# Altium PCB BMS pcb layout 3.PcbDoc
Units mil, origin at the board's own origin, x right, y up, seen from the top; angles counter-clockwise.
Board outline 3940 x 3940 mil, 2 copper layers (Top Layer, Bottom Layer); 55 components, 40 nets, 194 pads, 52 vias.
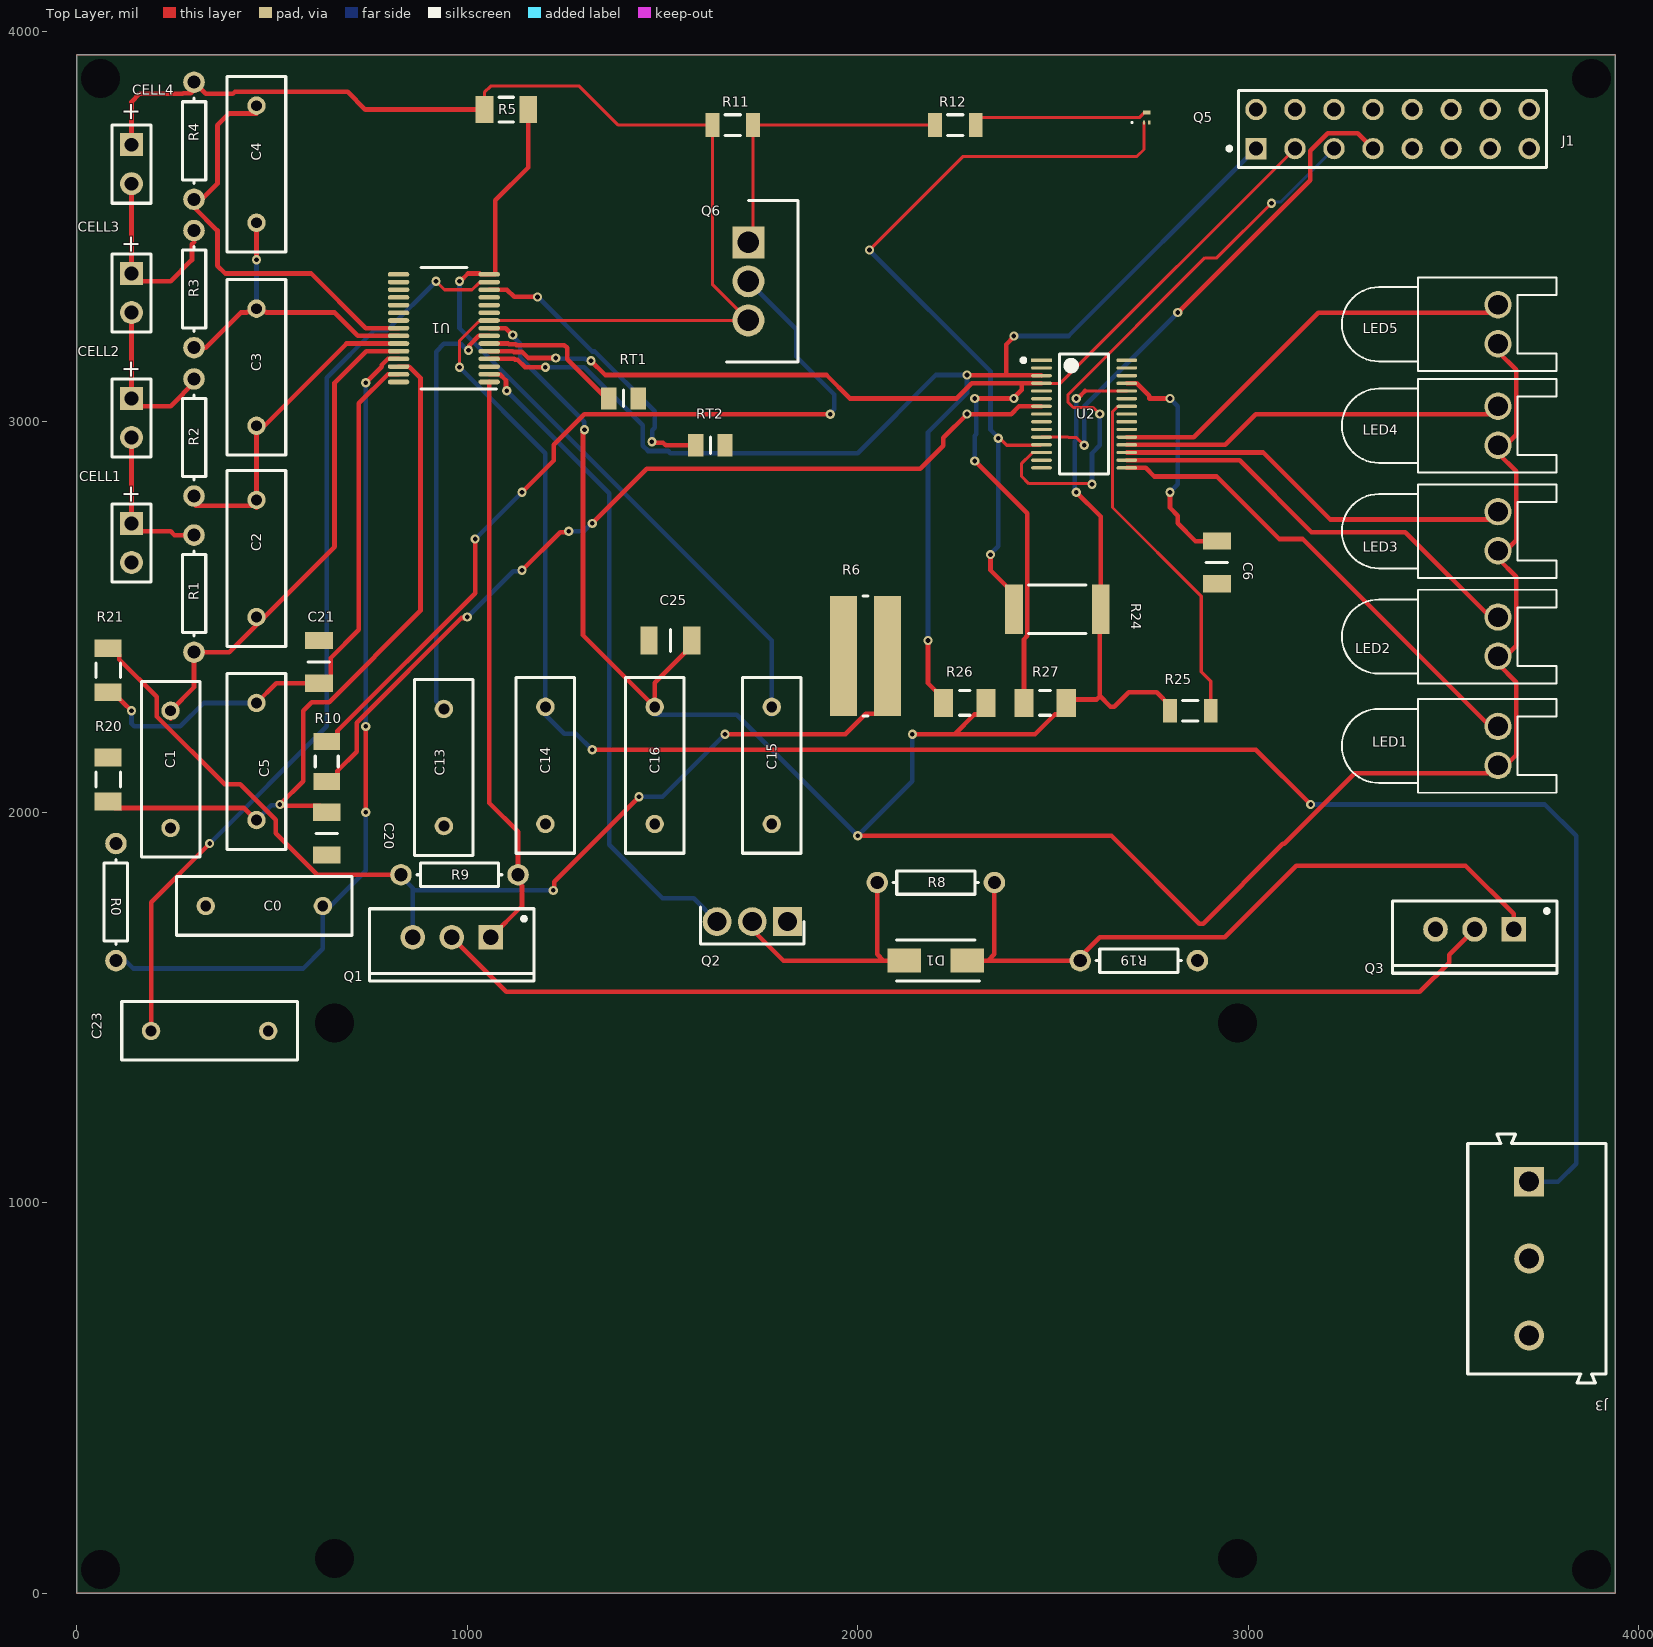
[diagram p0: Top Layer view]
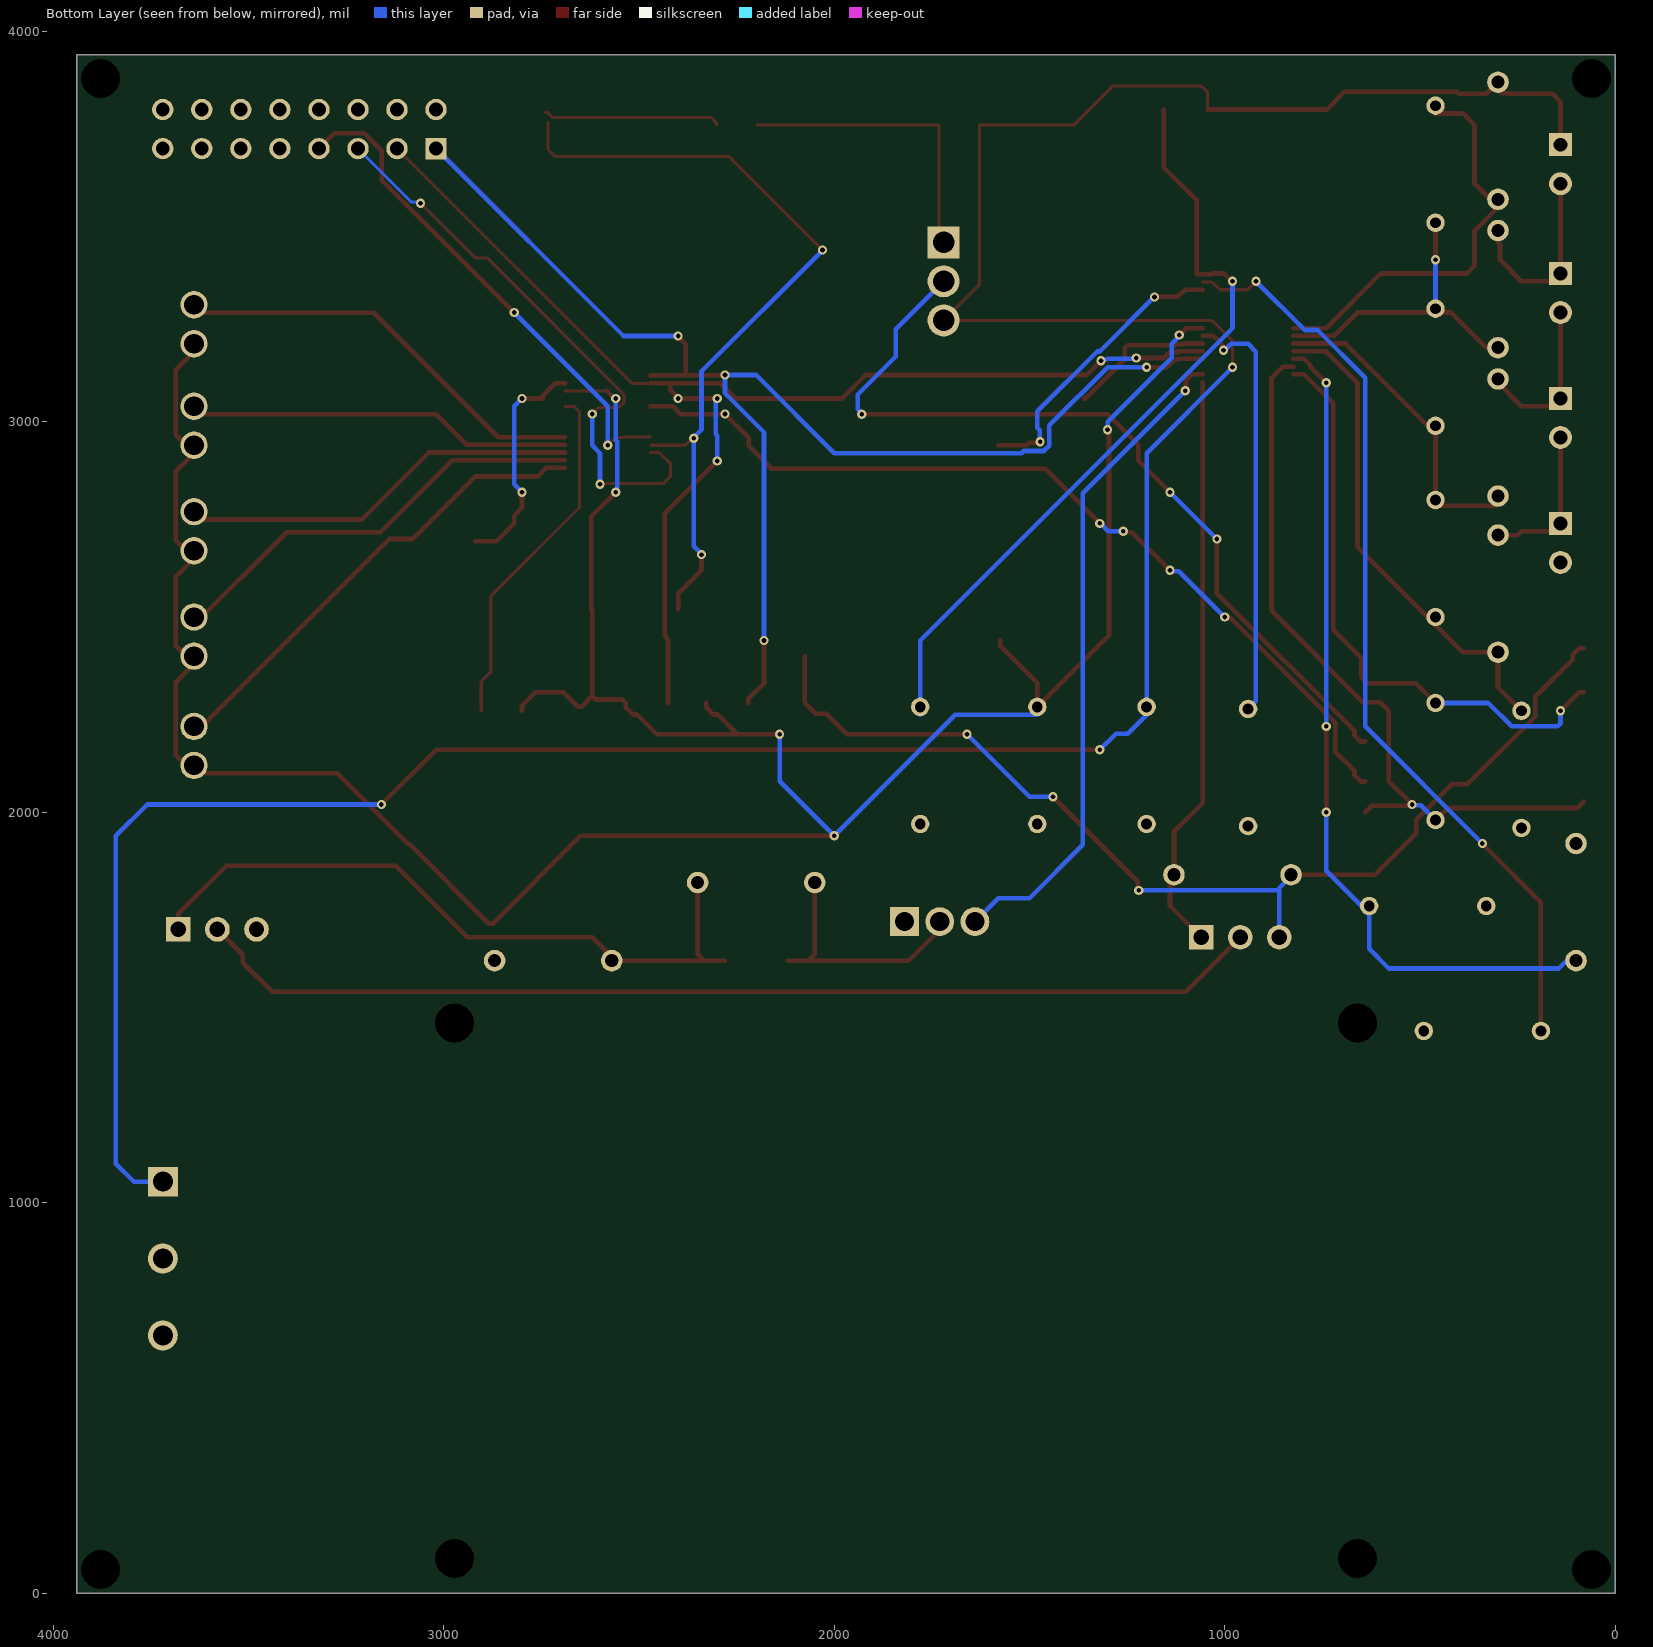
[diagram p1: Bottom Layer view, seen from below]

## Layer stack, top to bottom
Top Solder: solder mask 0.4, Solder Resist, Dk 3.5
Top Layer: signal copper 1.4
Dielectric 1: dielectric 12.6, FR-4, Dk 4.8
Bottom Layer: signal copper 1.4
Bottom Solder: solder mask 0.4, Solder Resist, Dk 3.5

## Board outline
0,3940 0,0 3940,0 3940,3940

## Design rules (kind name [scope] priority, off if disabled: settings)
Clearance Clearance_poly [InNamedPolygon('TOP-GND')or InNamedPolygon('BOT-GND')] p1: gap=25 ignorepadtopadclearanceinfootprint=FALSE
Clearance [All] p2: gap=5.91 ignorepadtopadclearanceinfootprint=FALSE
MinimumSolderMaskSliver [All] p1: minsoldermaskwidth=2.99
PolygonConnect [All] p1: connectstyle=Relief reliefconductorwidth=10 reliefentries=4 polygonreliefangle="90 Angle" airgapwidth=10
RoutingVias [All] p1: holewidth=12 width=23.62 viastyle="Through Hole" minholewidth=12 minwidth=23.62 maxholewidth=12 maxwidth=23.62
SilkToSolderMaskClearance [IsPad] p1: minsilkscreentomaskgap=1.45 clearancetoexposedcopper=TRUE
SolderMaskExpansion [All] p1: expansion=2.01 istentingtop=FALSE
Width [All] p1: maxlimit=78.74 minlimit=5.91 preferedwidth=11.81
28 further rules are at their usual default settings.

## Components (designator, comment, footprint, x,y, rotation, side; value= is the part's Value field where it differs from the comment)
C0 "" RAD-0.3 480,1760 r180 top value=1uF
C1 "" RAD-0.3 240,2110 r90 top value=1uF
C2 "" RAD-0.3 460,2650 r90 top value=1uF
C3 "" RAD-0.3 460,3140 r90 top value=1uF
C4 "" RAD-0.3 460,3660 r90 top value=1uF
C5 "" RAD-0.3 460,2130 r90 top value=1uF
C6 "C1206C151KGRACAUTO" CAPC3216X180N 2920,2640 r270 top
C13 "" RAD-0.3 940,2114.64 r90 top value=1uF
C14 "" RAD-0.3 1200,2120 r90 top value=1uF
C15 "" RAD-0.3 1780,2120 r90 top value=1uF
C16 "" RAD-0.3 1480,2120 r90 top value=1uF
C20 "C1206C151KGRACAUTO" CAPC3216X180N 640,1945.28 r90 top
C21 "C1206C151KGRACAUTO" CAPC3216X180N 620,2385.28 r90 top
C23 "" RAD-0.3 340,1440 r180 top value=1uF
C25 "C1206C151KGRACAUTO" CAPC3216X180N 1520,2440 r0 top
CELL1 "" BAT-2 140,2690 r270 top
CELL2 "" BAT-2 140,3010 r270 top
CELL3 "" BAT-2 140,3330 r270 top
CELL4 "" BAT-2 140,3660 r270 top
D1 "SMAJ16A-E3_61" DIOM5127X229N 2200,1620 r180 top
J1 "87227-8" FP-87227-8-MFG 3370,3750 r0 top
J3 "691101710003" 691101710003 3739.69,856.84 r270 top
LED1 "" LED-0 3640,2170 r270 top
LED2 "" LED-0 3640,2450 r270 top
LED3 "" LED-0 3640,2720 r270 top
LED4 "" LED-0 3640,2990 r270 top
LED5 "" LED-0 3640,3250 r270 top
Q1 "PSMN2R7-30PL-127" TO-220AB 960,1680 r180 top
Q2 "AOI21357" TO229P239X654X854-3P 1820,1720 r180 top
Q3 "PSMN2R7-30PL-127" TO-220AB 3580,1700 r180 top
Q5 "CSD17381F4" CSD17381F4 2740,3780 r90 top
Q6 "IRF9Z30PBF" TO254P465X1024X2050-3P 1720,3460 r270 top
R0 "" AXIAL-0.3 100,1770 r270 top value=1K
R1 "" AXIAL-0.3 300,2560 r270 top value=1K
R2 "" AXIAL-0.3 300,2960 r270 top value=1K
R3 "" AXIAL-0.3 300,3340 r270 top value=1K
R4 "" AXIAL-0.3 300,3720 r270 top value=1K
R5 "CRCW1206100RJNEA" FP-CRCW1206-e3-IPC_B 1100,3800 r0 top
R6 "FCSL76R001JER" FP-FCSL76-0R001-MFG 2020,2400 r0 top
R8 "" AXIAL-0.3 2200,1820 r180 top value=1M
R9 "" AXIAL-0.3 980,1840 r0 top value=1M
R10 "ERA8AEB304V" RESC3216X70X50LL20T25 640,2130 r90 top
R11 "ERJ-8GEYJ104V" RESC3216X70X50LL05T20 1680,3760 r0 top
R12 "ERJ-8GEYJ104V" RESC3216X70X50LL05T20 2250,3760 r0 top
R19 "" AXIAL-0.3 2720,1620 r180 top value=1M
R20 "CRCW1206100RJNEA" FP-CRCW1206-e3-IPC_B 80,2083.85 r90 top
R21 "CRCW1206100RJNEA" FP-CRCW1206-e3-IPC_B 80,2363.85 r90 top
R24 "CRCW25121M00FKEG" FP-CRCW2512-e3-IPC_C 2511.25,2520 r0 top
R25 "ERJ-8GEYJ104V" RESC3216X70X50LL05T20 2852.17,2260 r180 top
R26 "CRCW120610K0FKEAHP" RESC3116X65X50NL20T20 2274.13,2280 r0 top
R27 "CRCW120610K0FKEAHP" RESC3116X65X50NL20T20 2480,2280 r0 top
RT1 "NHQ103B375T10" RESC2113X66N 1400,3060 r0 top
RT2 "NHQ103B375T10" RESC2113X66N 1622.6,2940 r0 top
U1 "BQ7693000DBT" DBT0030A_N 940,3240 r180 top
U2 "BQ78350DBT-R1" FP-DBT0030A-IPC_C 2580,3020 r0 top

## Footprints (in the part's own frame and the unit in brackets; to place one, negate y for a bottom-side part, rotate by r counter-clockwise, add the part's x,y. Pads: shape width x height; smd on the part's side, far side on the other; paste and mask are expansions set on the pad)
691101710003 [mm] "5,00mm - modular - blue - Horizontal entry with pressure clamp - 12,6mm height - 03p"
  rect 1.95x1.95 hole 1.3: 1(-5,-0.5)
  round 1.95 hole 1.3: 2(0,-0.5) 3(5,-0.5)
  silkscreen extent -8.1,-4.5 8.1,4.5, body extent -8.1,-4.5 8.1,4.5, height 12.65
AXIAL-0.3 [mm] "Axial Device, Thru-Hole; 2 Leads; 0.3 in Pin Spacing"
  round 1.4 hole 0.85: 1(-3.81,0) 2(3.81,0)
  silkscreen extent -2.77,-0.76 2.77,0.76
BAT-2 [mm] "Battery; 2 Leads"
  rect 1.5x1.5 hole 0.9: 1(-1.27,0)
  round 1.5 hole 0.9: 2(1.27,0)
  silkscreen extent -2.54,-1.27 2.54,1.27
CAPC3216X180N [mm]
  rect 1.13x1.82 smd: 1(-1.39,0) 2(1.39,0)
  silkscreen extent 0,-0.7 0,0.7, body extent -1.6,-0.8 1.6,0.8, height 1.8
CSD17381F4 [mm]
  rect 0.25x0.15 smd: 1(-0.325,0.175) 2(-0.325,-0.175)
  rect 0.25x0.5 smd: 3(0.325,0)
  silkscreen extent -0.37,0.9 -0.28,1, body extent -0.5,-0.3 0.5,0.3, height 0.46
DBT0030A_N [mm]
  oval 1.4x0.3 smd paste+0 mask+0.051: 1(-2.95,3.5) 2(-2.95,3) 3(-2.95,2.5) 4(-2.95,2) 5(-2.95,1.5) 6(-2.95,1) 7(-2.95,0.5) 8(-2.95,0) 9(-2.95,-0.5) 10(-2.95,-1) 11(-2.95,-1.5) 12(-2.95,-2) 13(-2.95,-2.5) 14(-2.95,-3) 15(-2.95,-3.5) 16(2.95,-3.5) 17(2.95,-3) 18(2.95,-2.5) 19(2.95,-2) 20(2.95,-1.5) 21(2.95,-1) 22(2.95,-0.5) 23(2.95,0) 24(2.95,0.5) 25(2.95,1) 26(2.95,1.5) 27(2.95,2) 28(2.95,2.5) 29(2.95,3) 30(2.95,3.5)
  silkscreen extent -3.42,-3.95 1.5,3.95, body extent 0,0 0.25,0.25, height 0.25
DIOM5127X229N [mm]
  rect 2.2x1.55 smd: 1(-2.05,0) 2(2.05,0)
  silkscreen extent -2.83,-1.33 2.55,1.33, body extent -2.55,-1.33 2.55,1.33, height 2.29
FP-87227-8-MFG [mil]
  rect 54.69x54.69 hole 35 paste-39370.1 mask+0: 1(-350,-50)
  round 54.69 hole 35 paste-39370.1 mask+0: 2(-350,50) 3(-250,-50) 4(-250,50) 5(-150,-50) 6(-150,50) 7(-50,-50) 8(-50,50) 9(50,-50) 10(50,50) 11(150,-50) 12(150,50) 13(250,-50) 14(250,50) 15(350,-50) 16(350,50)
  silkscreen extent -423,-98 394,98, body extent -398,-102 398,102, height 10
FP-CRCW1206-e3-IPC_B [mil]
  rect 45.51x69.22 smd paste+0 mask+0: 1(-56.14,0) 2(56.14,0)
  silkscreen extent -19,-31 19,31, body extent -89,-44 89,44, height 10
FP-CRCW2512-e3-IPC_C [mil]
  rect 45.47x126.31 smd paste+0 mask+0: 1(-111.25,0) 2(111.25,0)
  silkscreen extent -74,-62 74,62, body extent -138,-69 138,69, height 10
FP-DBT0030A-IPC_C [mm]
  rect 1.355x0.212 smd paste+0 mask+0: 1(-2.775,3.5)
  rrect100% 1.355x0.212 smd paste+0 mask+0: 2(-2.775,3) 3(-2.775,2.5) 4(-2.775,2) 5(-2.775,1.5) 6(-2.775,1) 7(-2.775,0.5) 8(-2.775,0) 9(-2.775,-0.5) 10(-2.775,-1) 11(-2.775,-1.5) 12(-2.775,-2) 13(-2.775,-2.5) 14(-2.775,-3) 15(-2.775,-3.5) 16(2.775,-3.5) 17(2.775,-3) 18(2.775,-2.5) 19(2.775,-2) 20(2.775,-1.5) 21(2.775,-1) 22(2.775,-0.5) 23(2.775,0) 24(2.775,0.5) 25(2.775,1) 26(2.775,1.5) 27(2.775,2) 28(2.775,2.5) 29(2.775,3) 30(2.775,3.5)
  silkscreen extent -4.08,-3.9 1.6,3.9, body extent -3.55,-4 3.55,4, height 0.25
FP-FCSL76-0R001-MFG [mm]
  rect 1.75x7.8 smd paste+0 mask+0: 1(-1.425,0) 2(1.425,0)
  silkscreen extent -0.18,-3.9 0.18,3.9, body extent -2.4,-4 2.4,4, height 0.25
LED-0 [mil] "LED; 2 Leads"
  round 70 hole 50: 1(50,0) 2(-50,0)
  silkscreen extent -120,-400 120,150
RAD-0.3 [mm] "Radial Cap, Thru-Hole; 2 Leads; 0.3 in Pin Spacing"
  round 1.2 hole 0.7: 1(-3.81,0) 2(3.81,0)
  silkscreen extent -5.71,-1.91 5.71,1.91
RESC2113X66N [mm]
  rect 1x1.45 smd: 1(-0.95,0) 2(0.95,0)
  silkscreen extent 0,-0.54 0,0.54, body extent -1.03,-0.64 1.03,0.64, height 0.66
RESC3116X65X50NL20T20 [mm] "Chip Resistor, 2-Leads, Body 3.10x1.60mm, IPC Medium Density"
  rect 1.25x1.8 smd: 1(-1.375,0) 2(1.375,0)
  silkscreen extent -0.35,-0.8 0.35,0.8, body extent -1.65,-0.9 1.65,0.9, height 0.65
RESC3216X70X50LL05T20 [mm] "Chip Resistor, 2-Leads, Body 3.20x1.60mm, IPC High Density"
  rect 0.9x1.55 smd: 1(-1.325,0) 2(1.325,0)
  silkscreen extent -0.5,-0.67 0.5,0.67, body extent -1.63,-0.82 1.62,0.82, height 0.7
RESC3216X70X50LL20T25 [mm] "Chip Resistor, 2-Leads, Body 3.20x1.60mm, IPC High Density"
  rect 1.1x1.7 smd: 1(-1.3,0) 2(1.3,0)
  silkscreen extent -0.35,-0.75 0.35,0.75, body extent -1.7,-0.9 1.7,0.9, height 0.7
TO229P239X654X854-3P [mm]
  rect 1.875x1.875 hole 1.25: 1(0,0)
  round 1.875 hole 1.25: 2(2.29,0) 3(4.58,0)
  silkscreen extent -1.07,-0.94 5.66,1.45, body extent -0.98,-0.94 5.56,1.45, height 8.54
TO254P465X1024X2050-3P [mm]
  rect 2.085x2.085 hole 1.39: 1(0,0)
  round 2.085 hole 1.39: 2(2.54,0) 3(5.08,0)
  silkscreen extent -2.72,-1.43 7.8,3.22, body extent -2.58,-1.43 7.66,3.22, height 18.77
TO-220AB [mm] "TO, Thru-Hole, Vertical, Heatsink Mounted; 3 In-Line Leads; Pitch 2.54 mm"
  rect 1.6x1.6 hole 1: 1(-2.54,0)
  round 1.6 hole 1: 2(0,0) 3(2.54,0)
  silkscreen extent -5.35,-1.85 5.35,2.85, body extent -5.4,-1.9 5.4,2.9, height 19.3

## Part data
C0 C1 C2 C3 C4 C5: library part Cap, "Capacitor", LatestRevisionDate=17-Jul-2002, LatestRevisionNote="Re-released for DXP Platform.", PackageDescription="Radial Cap, Thru-Hole; 2 Leads; 0.3 in Pin Spacing", PackageReference=RAD-0.3, Published=8-Jun-2000, Publisher="Altium Limited"
C6 C25: "Capacitor Network", Manufacturer_Name=KEMET, Datasheet Link=https://content.kemet.com/datasheets/KEM_C1076_X7R_HV_AUTO_SMD.pdf, Height=1.8mm, Manufacturer_Part_Number=C1206C151KGRACAUTO, Supplier 1=Digi-Key
C13 C14 C15 C16 C23: library part Cap, "Capacitor", Supplier Part Number 1=70112128, LatestRevisionDate=17-Jul-2002, LatestRevisionNote="Re-released for DXP Platform.", PackageDescription="Radial Cap, Thru-Hole; 2 Leads; 0.3 in Pin Spacing", PackageReference=RAD-0.3, Published=8-Jun-2000, Publisher="Altium Limited", Supplier 1="Allied Electronics"
C20 C21: "Capacitor Network", Manufacturer_Name=KEMET, Supplier Part Number 1=399-C1206C151KGRACAUTOCT-ND, Datasheet Link=https://content.kemet.com/datasheets/KEM_C1076_X7R_HV_AUTO_SMD.pdf, Height=1.8mm, Manufacturer_Part_Number=C1206C151KGRACAUTO, Supplier 1=Digi-Key
CELL1 CELL2 CELL3 CELL4: library part Battery, "Multicell Battery", LatestRevisionDate=17-Jul-2002, LatestRevisionNote="Re-released for DXP Platform.", PackageDescription="Battery; 2 Leads", PackageReference=BAT-2, Published=24-Mar-1999, Publisher="Altium Limited"
D1: "Diode", Arrow Part Number=SMAJ16A-E3/61, Manufacturer_Name=Vishay, Mouser Part Number=625-SMAJ16A-E3, Arrow Price/Stock=https://www.arrow.com/en/products/smaj16a-e361/vishay?region=nac, Datasheet Link=https://datasheet.datasheetarchive.com/originals/distributors/Datasheets-DGA26/1844793.pdf, Height=2.29mm, Manufacturer_Part_Number=SMAJ16A-E3/61, Mouser Price/Stock=https://www.mouser.co.uk/ProductDetail/Vishay-General-Semiconductor/SMAJ16A-E3-61?qs=nE2yEqgPWzeXpRX%2FtbmQvg%3D%3D
J1: library part CMP-03369-000064-1, "CONN HEADER VERT 16POS 2.54MM", Current Rating=3A, Manufacturer="TE Connectivity", Package=0, Temperature="-65°C to +105°C", Temperature Range High=+105°C, Temperature Range Low=-65°C, Automotive=No, Category=Conn, ComponentLink2Description=Datasheet, ComponentLink2URL=https://www.te.com/usa-en/product-87227-8.datasheet.pdf, Conn Gender=Male, Conn Orientation=Straight, Contact Material=Gold,Nickel, Device Class L1=Connectors, Device Class L2="Headers and Wire Housings", Device Class L3=unset, Digikey Description="CONN HEADER VERT 16POS 2.54MM", Footprint Url=https://www.te.com/commerce/DocumentDelivery/DDEController?Action=showdoc&DocId=Customer+Drawing%7F87227%7FH4%7Fpdf%7FEnglish%7FENG_CD_87227_H4.pdf%7F87227-8, Height=0.428inch, Lead Free=Yes, Manufacturer Part Number=87227-8, Mouser Description="Headers & Wire Housings UNSHRD VERT DUAL 16", Number Of Contacts=16, Number Of Rows=2, Octopart=https://octopart.com/87227-8-te+connectivity-39407754, Pitch=2.54mm, RoHS=TRUE
J3: library part CMP-1502-03257-1, "Series 101 - 5.00 mm Horizontal Entry Modular with Pressure Clamp WR-TBL, 3 pin", Manufacturer="Wurth Elektronik", Operating Temperature=-40to105degC, Datasheet URL=http://katalog.we-online.de/em/datasheet/6911017100xx.pdf, Manufacturer URL=http://www.we-online.de, Mounting Technology=THT, Package Reference=691101710003, Packaging=Box, Part Number=691101710003, Pin Number=3, Pitch=5.00mm, Publisher=WurthElektronik
LED1 LED2 LED3 LED4 LED5: library part LED0, "Typical INFRARED GaAs LED", LatestRevisionDate=08-Jul-2005, LatestRevisionNote="Mech Layer 1 removed.", PackageDescription="LED; 2 Leads", PackageReference=LED-0, Published=8-Jun-2000, Publisher="Altium Limited"
Q1 Q3: library part PSMN2R7-30PL,127, "MOSFET (N-Channel)", Manufacturer_Name=Nexperia, Mouser Part Number=771-PSMN2R730PL127, Arrow Part Number=PSMN2R7-30PL,127, Arrow Price/Stock=https://www.arrow.com/en/products/psmn2r7-30pl127/nexperia, Datasheet Link=https://assets.nexperia.com/documents/data-sheet/PSMN2R7-30PL.pdf, Height=4.7mm, Manufacturer_Part_Number=PSMN2R7-30PL,127, Mouser Price/Stock=https://www.mouser.com/Search/Refine.aspx?Keyword=771-PSMN2R730PL127
Q2: "MOSFET (P-Channel)", Manufacturer_Name="Alpha & Omega Semiconductors", ComponentLink1Description="New link", Datasheet Link=http://www.aosmd.com/res/data_sheets/AOI21357.pdf, Height=2.39mm, Manufacturer_Part_Number=AOI21357
Q5: "MOSFET (N-Channel)", Manufacturer_Name="Texas Instruments", Datasheet Link=https://www.ti.com/lit/gpn/csd17381f4?HQS=ti-null-null-sf-df-pf-sep-wwe&DCM=yes?hkey=EF798316E3902B6ED9A73243A3159BB0, Height=0.36mm, Manufacturer_Part_Number=CSD17381F4
Q6: "MOSFET (P-Channel)", Manufacturer_Name=Vishay, Mouser Part Number=844-IRF9Z30PBF, Arrow Part Number=IRF9Z30PBF, Arrow Price/Stock=https://www.arrow.com/en/products/irf9z30pbf/vishay?region=nac, Datasheet Link=https://www.vishay.com/docs/91459/sihf9z30.pdf, Height=4.65mm, Manufacturer_Part_Number=IRF9Z30PBF, Mouser Price/Stock=https://www.mouser.co.uk/ProductDetail/Vishay-Semiconductors/IRF9Z30PBF?qs=cvaI6ThkwxutsTwPQAypYg%3D%3D
R0 R1 R2 R3 R4 R8 R9 R19: library part Res1, "Resistor", LatestRevisionDate=17-Jul-2002, LatestRevisionNote="Re-released for DXP Platform.", PackageDescription="Axial Device, Thru-Hole; 2 Leads; 0.3 in Pin Spacing", PackageReference=AXIAL-0.3, Published=8-Jun-2000, Publisher="Altium Limited"
R5 R20 R21: library part CMP-2003-04802-2, "RES Thick Film, 100Ω, 5%, 0.25W, 200ppm/°C, 1206", Case Code (Imperial)=1206, Case Code (Metric)=3216, Max Operating Temperature=155°C, Min Operating Temperature=-55°C, Package Quantity=5000, Power Rating=250mW, Resistance=100R, Temperature Coefficient=200ppm/°C, Tolerance=5%, Voltage Rating=200V, Case/Package=1206, Composition="Thick Film", Contact Plating=Tin, Depth=1.6mm, Height=0.55mm, Length=3.2mm, Military Standard=Not, Mount="Surface Mount", Packaging="Tape and Reel", Radiation Hardening=No, Termination=SMD/SMT, Weight=0.000353oz, Width=1.6mm
R6: library part CMP-33361-000036-1, "RES 0.001 OHM 3W 3015 WIDE", Case Code (Imperial)=3015, Case Code (Metric)=7638, Max Operating Temperature=155°C, Max Power Dissipation=3W, Min Operating Temperature=-55°C, Package Quantity=1000, Resistance=1mR, Resistance Tolerance=5%, Resistor Type="Metal Foil", Temperature Coefficient=150ppm/°C, Case/Package=7638, Depth=3.8mm, Features="Moisture Resistant", Height=1.35mm, Height - Seated (Max)=0.028inch, Length=0.15inch, Mount="Surface Mount", Number of Pins=2, Number of Terminations=2, Packaging="Tape and Reel", Power Rating=3W, RoHS Compliant=Yes, Series=FCSL, Technology="METAL FOIL", Termination=SMD/SMT, Tolerance=5%, Width=7.6mm
R10: library part CMP-2003-04453-1, Manufacturer=Panasonic, Part Number=ERA8AEB304V
R11 R12 R25: library part CMP-2003-00546-1, Manufacturer=Panasonic, Part Number=ERJ-8GEYJ104V
R24: library part CMP-02407-005447-1, "RES Thick Film, 1MΩ, 1%, 1W, 100ppm/°C, 2512", Case Code (Imperial)=2512, Case Code (Metric)=6432, Max Operating Temperature=155°C, Max Power Dissipation=1W, Min Operating Temperature=-55°C, Package Quantity=10, Resistance=1MR, Temperature Coefficient=100ppm/°C, Tolerance=1%, Voltage Rating=500V, Case/Package=2512, Composition="Thick Film", Contact Plating=Tin, Depth=3.15mm, Features="Automotive AEC-Q200", Height=0.6mm, Lead Free="Lead Free", Length=6.3mm, Military Standard=Not, Number of Pins=2, Number of Terminations=2, Packaging="Tape and Reel", Power Rating=1W, Radiation Hardening=No, REACH SVHC="No SVHC", Termination=SMD/SMT, Voltage Rating (DC)=500V, Weight=0.001429oz, Width=3.15mm
R26 R27: library part CMP-2003-04883-1, Manufacturer="Vishay Dale", Part Number=CRCW120610K0FKEAHP
RT1 RT2: "Thermistor", Manufacturer_Name=Amphenol, Datasheet Link=https://ad.componentsearchengine.com/Datasheets/2/NHQ103B375T10.pdf, Height=0.66mm, Manufacturer_Part_Number=NHQ103B375T10
U1: "No Description Available", Mfr_Name="Texas Instruments", Copyright="Copyright (C) 2022 Ultra Librarian. All rights reserved.", Manufacturer_Part_Number=BQ7693000DBT, RefDes=RefDes, Type=DEV
U2: library part CMP-04911-000039-1, "IC BATTERY MGMT CTRLR 30TSSOP", Case/Package=TSSOP, Max Operating Temperature=85°C, Max Supply Voltage=2.6V, Min Operating Temperature=-40°C, Min Supply Voltage=2.4V, Output Voltage=5.5V, Contact Plating=Gold, Fault Protection="Over Current", Interface=SMBus, Lead Free="Lead Free", Mount="Surface Mount", Number of Pins=30, Packaging=Rail/Tube, REACH SVHC="No SVHC", RoHS Compliant=Yes

## Free pads (board coordinates)
  round 60 hole 100: 2(60,3880) 3(60,60) 4(3880,60) 5(660,1460) 5(3880,3880) 6(2972.5,1460) 7(2972.5,89.13) 8(660,89.13)

## Via types
v1: diameter 23.62, hole 12, Top Layer to Bottom Layer, 52 vias

## Nets (pads, with @x,y where several pads share a name; then routed paths per layer and width w, separated by ;. In a path a pad name is that pad's centre, name@x,y a point inside that pad or via, vN(x,y) a via of type N, cw(c..) or ccw(c..) an arc to the next point about the centre after c; other vN are vias at no path point)
BAT: C15.2 R5.2 U1.15 | length 1999.6
  Top Layer w11.81: v1(980,3360) 981.76,3360 1001.76,3380 1032.28,3380 1034.49,3377.8 U1.15 1071.89,3377.8 1071.89,3567.28 1156.14,3651.54 R5.2
  Bottom Layer w11.81: v1(980,3360) 980,3240 1780,2440 C15.2 C15.2@1780,2250
CAP1: C13.2 U1.7 | length 1104.7
  Top Layer w11.81: v1@1001.04,3181.04 v1(1003.3,3183.3) 1005.56,3185.56 1005.56,3196.75 1029.12,3220.31 U1.7
  Bottom Layer w11.81: C13.2@940,2260 C13.2 920,2284.64 920,3180 940,3200 983.4,3200 1000.1,3183.3 v1(1003.3,3183.3)
CHG: Q2.3 U1.2 | length 1706.1
  Top Layer w11.81: U1.2 1083.16,3121.89 1099.04,3106.01 1099.04,3082.13 v1(1101.3,3079.87)
  Bottom Layer w11.81: v1(1101.3,3079.87) 1363.62,2817.55 1363.62,1916.38 1500,1780 1579.68,1780 Q2.3
DSG: Q1.1 R9.2 U1.1 | length 1490.1
  Top Layer w11.81: U1.1 1056.14,2023.86 1130,1950 R9.2 1138.29,1831.71 1138.29,1813.14 1140,1811.43 1140,1760 Q1.1
GND: C0.2 C1.1 C6.2 C13.1 C14.1 C15.1 C16.1 C20.1 C21.2 C23.1 C25.1 CELL1.2 J3.3 pad.2 pad.3 pad.4 pad.5 pad.6 pad.7 pad.8 Q2.1 Q3.3 Q5.2 R0.1 R6.1 R19.1 R20.2 RT1.2 RT2.2 U1.3 U1.10 U2.6 U2.8 U2.9 U2.14 U2.22 U2.23 U2.25 U2.30
LED1: LED1.2 U2.16 | length 1233.3
  Top Layer w11.81: U2.16 2737.8,2882.2 2760,2860 2920,2860 3080,2700 3140,2700 LED1.2@3640,2200
LED2: LED2.2 U2.17 | length 1125.5
  Top Layer w11.81: U2.17 2978.11,2901.89 3162.28,2717.72 3402.28,2717.72 LED2.2@3640,2480
LED3: LED3.2 U2.18 | length 1021.8
  Top Layer w11.81: U2.18 3038.43,2921.57 3210,2750 LED3.2@3640,2750
LED4: LED4.2 U2.19 | length 983.3
  Top Layer w11.81: U2.19 2941.26,2941.26 3020,3020 LED4.2@3640,3020
LED5: LED5.2 U2.20 | length 1082.9
  Top Layer w11.81: U2.20 2860.94,2960.94 3180,3280 LED5.2@3640,3280
NetC5_1: C5.1 C20.2 R20.1 U1.28 | length 1940.7
  Top Layer w11.81: R20.1 96.85,2010.86 429.14,2010.86 C5.1 ; C20.2 623.66,2016.34 526.86,2016.34 523.2,2020 v1(520,2020) 580,2080 580,2260 601.71,2281.71 645.93,2281.71 880,2515.78 880,3113.08 851.51,3141.57 U1.28
  Bottom Layer w11.81: C5.1 497.74,2017.74 517.74,2017.74 v1(520,2020)
NetC5_2: C5.2 C21.1 R21.1 U1.29 | length 1541.1
  Top Layer w11.81: R21.1 91.85,2307.71 118.68,2280.88 119.12,2280.88 v1(140,2260) ; C5.2 510.55,2330.55 C21.1 633.58,2330.55 649.92,2346.89 649.92,2395.15 722.39,2467.62 722.39,3047.45 796.84,3121.89 U1.29
  Bottom Layer w11.81: v1(140,2260) 140,2226.92 146.92,2220 265.21,2220 325.21,2280 C5.2
NetC6_1: C6.1 U2.27 | length 594.4
  Top Layer w11.81: U2.27 2714.7,3098.74 2746.59,3066.85 2746.59,3060 v1(2800,3060) ; v1(2800,2820) 2800,2780 2820,2760 2820,2740 2865.28,2694.72 C6.1
  Bottom Layer w11.81: v1(2800,2820) 2820,2840 2820,3040 v1(2800,3060)
NetC23_2: C23.2 U1.14 | length 2395.1
  Top Layer w8: v1(920,3360) 941.72,3338.28 1011.99,3338.28 1027.94,3354.24 1029.58,3354.24 1033.46,3358.11 U1.14
  Top Layer w11.81: C23.2 190,1770 v1(340,1920)
  Bottom Layer w11.81: v1(340,1920) 640,2220 640,3113.08 762.33,3235.41 795.41,3235.41 v1(920,3360)
NetCELL1_1: CELL1.1 CELL2.2 R1.1 | length 384.1
  Top Layer w11.9: CELL2.2@140,2940 CELL1.1 140,2720 240,2720 250,2710 R1.1
NetCELL2_1: CELL2.1 CELL3.2 R2.1 | length 406.1
  Top Layer w11.9: CELL3.2@140,3260 140,3050 150,3040 240,3040 R2.1@305,3105
NetCELL3_1: CELL3.1 CELL4.2 R3.1 | length 494.9
  Top Layer w11.9: CELL4.2@140,3630 140,3360 240,3360 294.72,3414.72 294.72,3454.72 300,3460
NetD1_1: D1.1 Q3.1 R8.1 R19.2 | length 1803.7
  Top Layer w11.81: D1.1 2333.86,1620 ; R8.1 2350,1636.14 2333.86,1620 ; Q3.1 3680,1740 3556.69,1863.31 3123.31,1863.31 2940,1680 2620,1680 2570,1630 R19.2 2333.86,1620
NetD1_2: D1.2 Q2.2 R8.2 | length 643.3
  Top Layer w11.81: Q2.2@1720,1710 1810,1620 2066.14,1620 ; R8.2 2050,1636.14 2066.14,1620 ; D1.2 2066.14,1620
NetQ1_2: Q1.2 Q3.2 | length 2756
  Top Layer w11.81: Q1.2 1100,1540 3440,1540 3515.1,1615.1 3515.1,1635.1 Q3.2
NetQ1_3: Q1.3 R6.2 R9.1 R21.2 | length 2765.3
  Top Layer w11.81: v1(1220,1800) 1222.26,1802.26 1222.26,1822.26 v1(1440,2040) ; v1(1660,2200) 1968.59,2200 2020.96,2252.36 2047.56,2252.36 2076.1,2280.91 R6.2
  Top Layer w11.9: R21.2 91.85,2420 108.66,2403.19 108.66,2391.34 204.52,2295.48 204.52,2245.3 378.25,2071.58 418.59,2071.58 508.93,1981.25 508.93,1946.79 615.71,1840 R9.1
  Bottom Layer w11.81: R9.1 830,1835.97 860,1805.97 860,1800 ; Q1.3 860,1800 ; v1(1220,1800) 860,1800 ; v1(1440,2040) 1500,2040 v1(1660,2200)
NetQ5_1: Q5.1 R24.1 U2.12 | length 2086.2
  Top Layer w8: v1(2030,3440) 2270,3680 2715.31,3680 2733.11,3697.8 Q5.1 ; v1(2360,2958.28) 2363.47,2958.28 2381.76,2940 U2.12@2469.47,2940
  Top Layer w11.81: v1(2340,2660) 2340,2620.42 2400,2560.42 R24.1
  Bottom Layer w11.81: v1(2030,3440) 2340,3130 2340,2980 2360,2960 v1(2360,2958.28) 2360,2681.76 2340,2661.76 v1(2340,2660)
NetQ5_3: Q5.3 R12.2 | length 455.1
  Top Layer w8: R12.2 2302.17,3766.28 2315.88,3780 2722.28,3780 2735.08,3792.8 Q5.3
NetQ6_1: Q6.1 R11.2 R12.1 | length 770.7
  Top Layer w8: Q6.1 1732.17,3472.17 R11.2 R12.1
NetQ6_2: Q6.2 R10.2 | length 2184.7
  Top Layer w11.81: R10.2 651.81,2181.18 667.56,2196.93 667.56,2208.74 1020,2561.18 v1(1020,2700) ; v1(1140,2820) 1221.13,2901.13 1221.13,2941.13 1300,3020 1337.67,3020 1338.02,3019.65 v1(1929.65,3019.65)
  Bottom Layer w11.81: v1(1020,2700) v1(1140,2820) ; Q6.2 1842.58,3237.42 1842.58,3167.42 1940,3070 1940,3032.47 1929.65,3022.12 v1(1929.65,3019.65)
NetR10_1: R10.1 U2.7 | length 2291.1
  Top Layer w11.81: R10.1 651.81,2078.82 667.56,2094.57 667.56,2106.38 716.38,2155.2 716.38,2229.78 984.33,2497.74 997.74,2497.74 v1(1000,2500) ; v1(1140,2620) 1237.74,2717.74 1257.74,2717.74 v1(1260,2720) ; v1(1320,2740) 1460,2880 2160,2880 2218.87,2938.87 2218.87,2958.87 v1(2280,3020) 2393.41,3020 2413.09,3039.68 U2.7
  Bottom Layer w11.81: v1(1000,2500) 1117.74,2617.74 1137.74,2617.74 v1(1140,2620) ; v1(1260,2720) 1298.24,2720 1318.24,2740 v1(1320,2740)
NetR25_1: R25.1 U2.24 | length 912.4
  Top Layer w8: U2.24 2666.67,3039.68 2661.07,3034.09 2660.93,3034.09 2652.68,3025.84 2652.68,2780.52 2880,2553.2 2880,2360 2904.33,2335.67 R25.1
NetRT1_1: RT1.1 U1.6 | length 379.3
  Top Layer w11.81: U1.6 1104.89,3200.63 1106.86,3198.66 1124,3198.66 1125.96,3196.69 1248.64,3196.69 1255.56,3189.78 1255.56,3160.51 1356.06,3060 RT1.1@1360,3060
REGOUT: C16.2 C25.2 LED1.1 LED2.1 LED3.1 LED4.1 LED5.1 R24.2 R25.2 R26.2 R27.2 U1.8 U2.26 | length 7293.9
  Top Layer w8: 2582.25,3079.06 U2.26
  Top Layer w11.81: U1.8 1098.93,3240 v1(1116.65,3222.28) ; v1(1300,2980) 1300,2976.8 1296.38,2973.18 1296.38,2453.62 1470,2280 C16.2@1470,2260 ; C16.2 1480,2331.69 1574.72,2426.42 C25.2 ; v1(2000,1940) 2650,1940 2875.11,1714.89 2884.89,1714.89 3089.14,1919.14 3092.55,1919.14 3273.41,2100 3640,2100 3686.81,2146.81 3686.81,2333.19 3640,2380 3686.81,2426.81 3686.81,2603.19 3640,2650 3686.81,2696.81 3686.81,2873.19 3640,2920 3686.81,2966.81 3686.81,3133.19 LED5.1@3640,3180 ; v1(2140,2200) 2248.27,2200 ; R26.2 2328.27,2269.17 2309.57,2250.47 2298.74,2250.47 2248.27,2200 ; v1(2560,2820) 2622.49,2757.51 R24.2 2619.61,2517.11 2619.61,2298.06 ; v1(2560,3060) 2563.2,3060 2582.25,3079.06 ; R25.2 2800,2272.8 2765.55,2307.24 2694.44,2307.24 2657.32,2270.13 2647.54,2270.13 2619.61,2298.06 ; 2248.27,2200 2454.13,2200 2504.61,2250.47 2515.43,2250.47 2534.13,2269.17 R27.2 2543.16,2289.03 2612.69,2289.03 2619.61,2295.95 2619.61,2298.06
  Bottom Layer w11.81: v1(1116.65,3222.28) 1116.65,3219.09 1135.86,3199.87 1135.86,3164.14 1300,3000 v1(1300,2980) ; C16.2@1480,2250 1690,2250 v1(2000,1940) 2140,2080 v1(2140,2200) ; v1(2560,2820) 2560,2823.2 2556.38,2826.82 2556.38,2949.78 2560,2953.41 v1(2560,3060)
REGSRC: C14.2 CELL4.1 J3.1 Q6.3 R4.1 R5.1 R11.1 U1.9 | length 7856.1
  Top Layer w8: v1(980,3140) 980,3207.87 1027.94,3255.81 1029.58,3255.81 1033.46,3259.68 U1.9 1056.3,3259.84 1719.84,3259.84 Q6.3 1627.83,3352.17 R11.1 1387.06,3760 1287.06,3860 1060,3860 1043.86,3843.85 R5.1
  Top Layer w11.9: CELL4.1@140,3690 CELL4.1 140,3820 160,3840 271.43,3840 273.14,3841.71 291.71,3841.71 300,3850 R4.1@304.03,3850 ; R4.1 330,3840 399.61,3840 405.09,3845.48 693.33,3845.48 738.81,3800 R5.1 ; v1(1320,2160) 3020,2160 v1(3160,2020)
  Bottom Layer w11.9: v1(980,3140) 1200,2920 C14.2 1200,2250 1248.39,2201.61 1278.39,2201.61 v1(1320,2160) ; v1(3160,2020) 3760,2020 3840,1940 3840,1100 3793.7,1053.7 J3.1
SCL: J1.3 R27.1 U1.5 U2.4 | length 3368.4
  Top Layer w8: U2.4 2518.74,3098.74 J1.3
  Top Layer w11.81: U1.5 1116.66,3180.94 1118.63,3178.98 1141.02,3178.98 1156.38,3163.62 v1(1226.38,3163.62) ; v1(1316.7,3156.7) 1353.41,3120 1920,3120 1980,3060 2253.41,3060 2292.15,3098.74 2420,3098.74 ; v1(2300,2900) 2434.55,2765.45 2434.55,2451.95 2425.87,2443.27 R27.1 ; v1(2300,3060) v1(2400,3060) 2400,3061.76 2420,3081.76 2420,3098.74 ; U2.4 2420,3098.74
  Bottom Layer w11.81: v1(1226.38,3163.62) 1228.19,3161.81 1301.59,3161.81 1304.43,3158.96 1314.44,3158.96 v1(1316.7,3156.7) ; v1(2300,2900) 2300,2964.68 2303.62,2968.3 2303.62,3053.18 2300,3056.8 v1(2300,3060)
SDA: J1.1 R26.1 U1.4 U2.3 | length 3455.9
  Top Layer w11.81: U1.4 1120.28,3161.26 1122.25,3159.29 1128.64,3159.29 1147.93,3140 v1(1200,3140) v1@1198.74,3141.26 ; v1(2180,2440) 2180,2330.83 2220,2290.83 R26.1 ; v1(2280,3120) 2280.79,3119.21 2380,3119.21 ; v1(2400,3220) 2400,3218.24 2380,3198.24 2380,3119.21 ; U2.3 2469.95,3119.21 2380,3119.21
  Bottom Layer w11.81: v1(1200,3140) 1300,3140 1449.14,2990.86 1449.14,2939.36 1462.98,2925.52 1514.48,2925.52 1520,2920 2000,2920 2200,3120 v1(2280,3120) 2280,3073.41 2180,2973.41 v1(2180,2440) ; v1(2400,3220) 2540,3220 J1.1
SMBC: J1.5 U2.13 | length 1530.5
  Top Layer w8: U2.13 2448.14,2921.57 2442.54,2915.98 2442.4,2915.98 2420,2893.58 2420,2860 2438.28,2841.72 2598.28,2841.72 v1(2600,2840) ; v1(2620,3020) 2603,3037 2552.29,3037 2538.28,3051 2538.28,3069 2889.29,3420 2920,3420 v1(3060,3560)
  Top Layer w11.81: v1(2620,3020) v1@2622.39,3020
  Bottom Layer w8: v1(3060,3560) 3062.99,3562.99 3082.99,3562.99 J1.5
  Bottom Layer w11.81: v1(2600,2840) 2600,2920 2620,2940 v1(2620,3020)
SMBD: J1.7 U2.11 | length 1307.9
  Top Layer w8: U2.11 2539.06,2960.94 2540,2960 2560,2960 v1(2580,2940)
  Top Layer w11.81: v1(2820,3280) 3159.15,3619.15 3159.15,3694.52 3203.78,3739.15 3280.85,3739.15 J1.7
  Bottom Layer w11.81: v1(2580,2940) 2580,3040 v1(2820,3280)
TS2: RT2.1 U1.13 | length 744.6
  Top Layer w11.81: U1.13 1101.57,3338.43 1120,3320 v1(1180,3320) ; v1(1472.77,2949.14) 1475.03,2946.88 1501.32,2946.88 1508.2,2940 RT2.1@1580,2940
  Bottom Layer w11.81: v1(1180,3320) 1319.67,3180.33 1326.49,3180.33 1480,3026.81 1480,2984.58 1474.09,2978.67 1474.09,2950.47 v1(1472.77,2949.14)
VC0: C0.1 R0.2 U1.27 | length 2153.9
  Top Layer w11.81: v1(740,2000) v1(740,2220) ; v1(740,3100) 781.26,3141.26 781.26,3145.68 796.84,3161.26 U1.27
  Bottom Layer w11.81: R0.2@120,1630 120,1624.24 144.24,1600 580,1600 630,1650 630,1740 740,1850 v1(740,2000) ; v1(740,2220) v1(740,3100)
VC1: C1.2 C2.1 R1.2 U1.26 | length 1284.1
  Top Layer w11.9: C1.2@240,2240 C1.2 300,2320 R1.2 390,2410 660,2680 660,3100 740.94,3180.94 U1.26
VC2: C2.2 C3.1 R2.2 U1.25 | length 813.5
  Top Layer w11.9: R2.2@300,2790 305,2785 455,2785 460,2780 C2.2 460,2970 690.63,3200.63 U1.25
VC3: C3.2 C4.1 R3.2 U1.24 | length 801.2
  Top Layer w11.9: R3.2 330,3190 420,3280 435.36,3280 438.59,3283.24 456.76,3283.24 460,3280 463.24,3283.24 481.41,3283.24 484.64,3280 660,3280 719.69,3220.31 U1.24 ; v1(460,3415) C4.1@460,3490
  Bottom Layer w11.81: C3.2@460,3280 C3.2
  Bottom Layer w11.9: C3.2 v1(460,3415)
VC4: C4.2 R4.2 U1.23 | length 1052.3
  Top Layer w11.9: C4.2@460,3790 390,3790 360,3760 360,3610 300,3550 360,3490 360,3400 380,3380 600,3380 740,3240 U1.23
pads on no net: J1.2 J1.4 J1.6 J1.8 J1.9 J1.10 J1.11 J1.12 J1.13 J1.14 J1.15 J1.16 J3.2 U1.11 U1.12 U1.16 U1.17 U1.18 U1.19 U1.20 U1.21 U1.22 U1.30 U2.1 U2.2 U2.5 U2.10 U2.15 U2.21 U2.28 U2.29

## Polygon pours and split planes (outlines as drawn)
GND on Top Layer "1-GND" (solid, shelved, pour order 0): 3940,3940 3940,0 0,0 0,3940
GND on Bottom Layer "2-GND" (solid, shelved, pour order 1): 0,3940 3940,3940 3940,0 0,0

## Text inside footprints (layer, text, board x,y; h text height)
CELL1: Top Overlay "+" at 120,2840 h45.28 r270
CELL2: Top Overlay "+" at 120,3160 h45.28 r270
CELL3: Top Overlay "+" at 120,3480 h45.28 r270
CELL4: Top Overlay "+" at 120,3820 h45.28 r270